# Altium PCB PG4D.PcbDoc (part 3 of 3)
Units mm, origin at the board's own origin, x right, y up, seen from the top; angles counter-clockwise.
Board outline 105.86 x 51.8 mm, 4 copper layers (Top Layer, L2 Flex GND, L3 Flex Signals, Bottom Layer), stack 0.361 mm thick; 218 components, 118 nets, 582 pads, 307 vias.
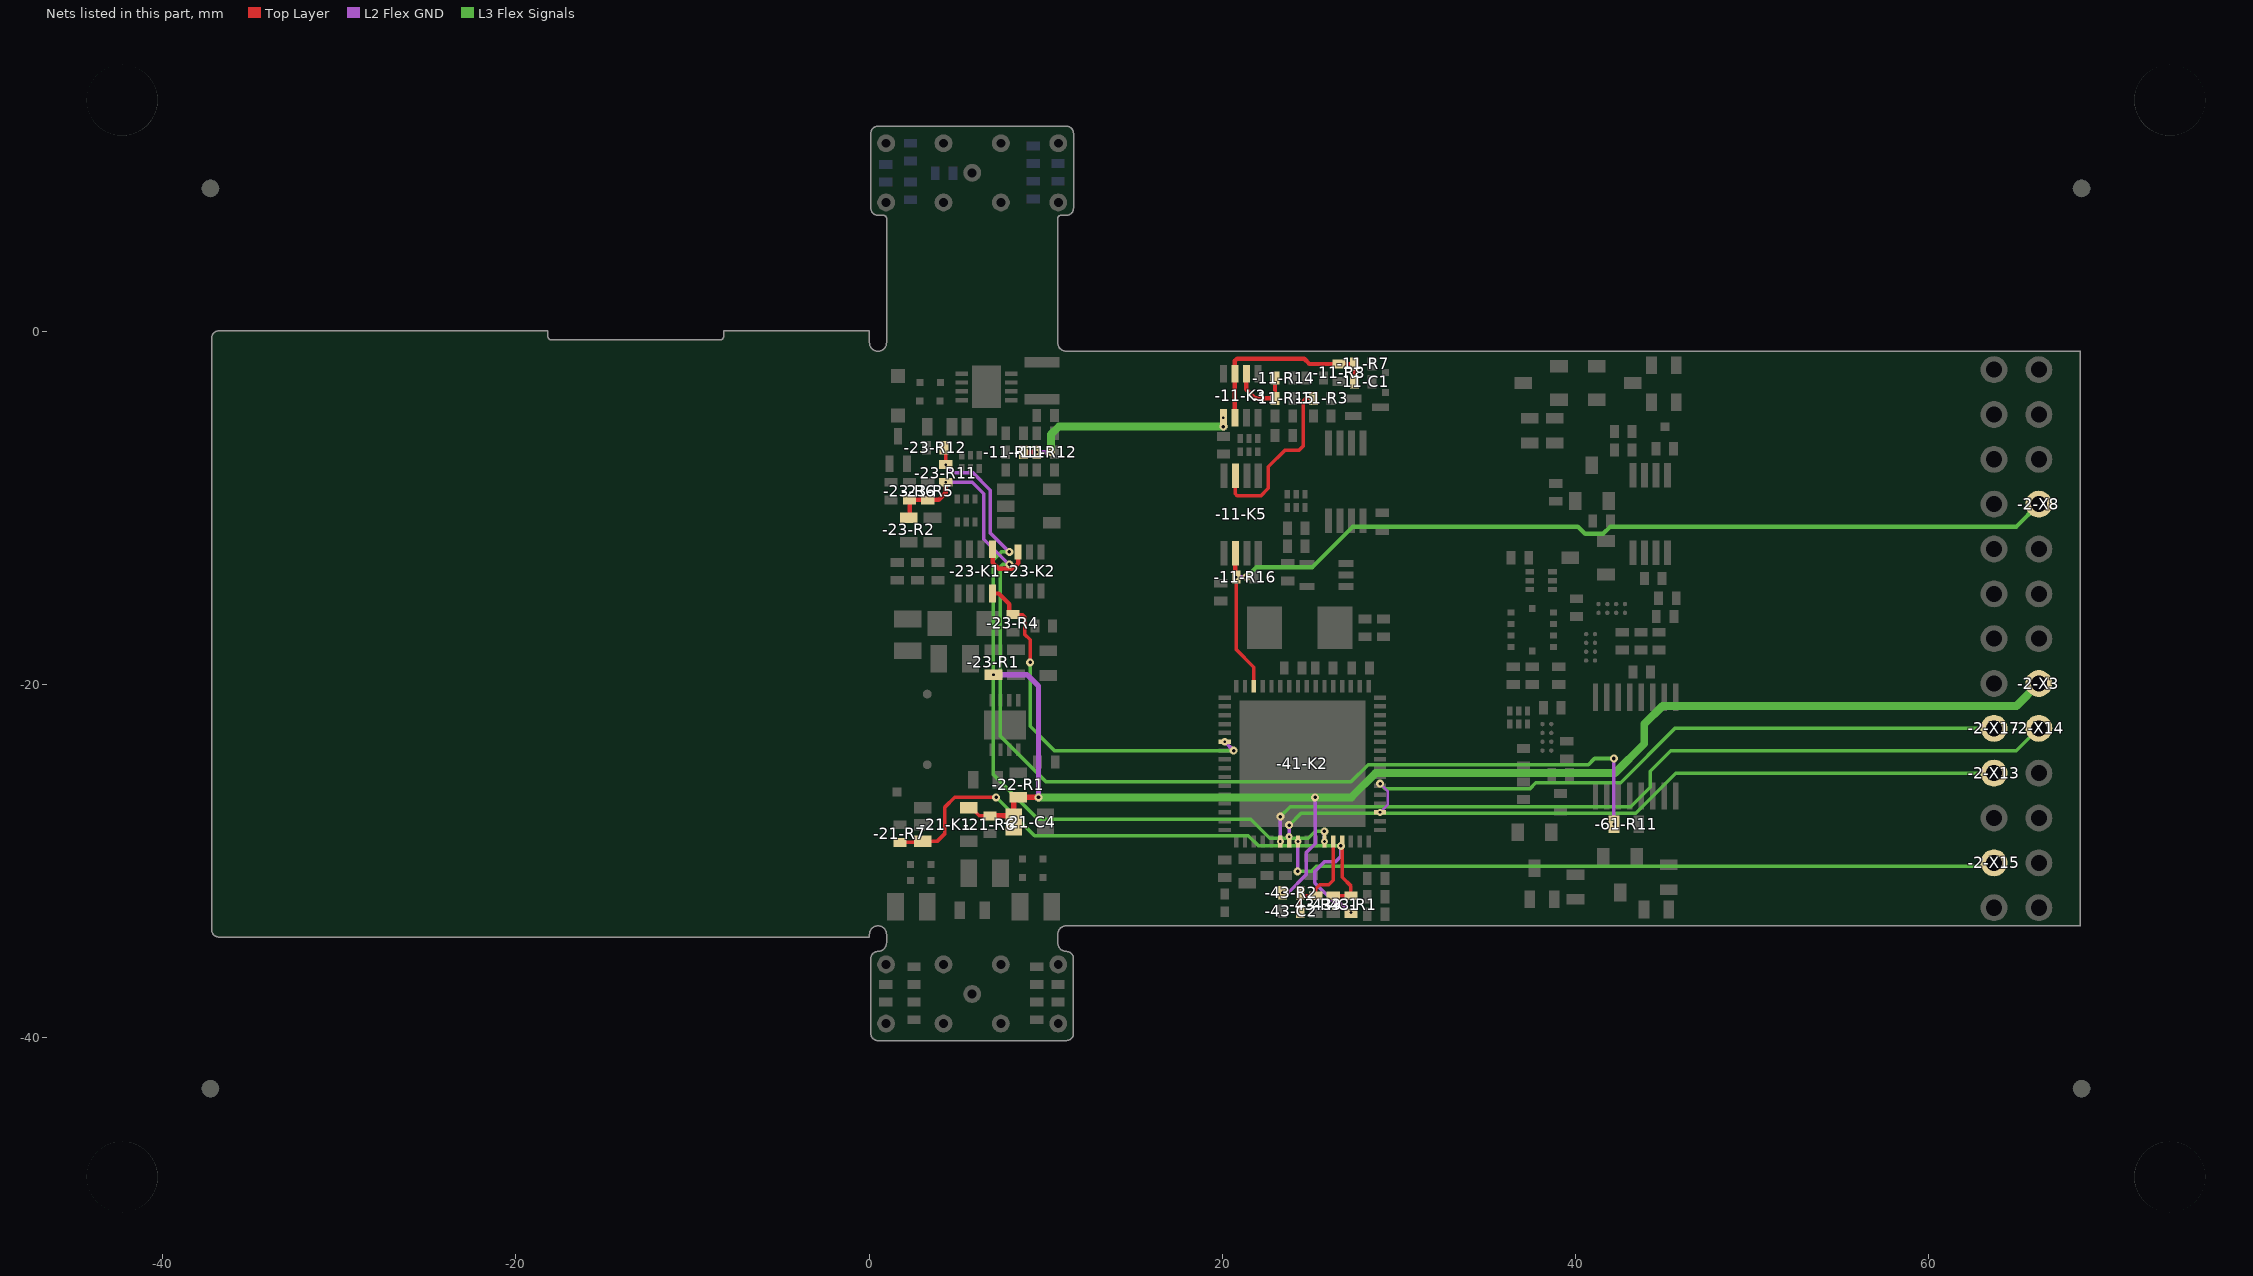
[diagram p5: the nets of this part, all layers, seen from the top]

## Via types
v1: diameter 0.45, hole 0.15, Top Layer to L2 Flex GND, tented both sides, 88 vias
v2: diameter 0.45, hole 0.2, Top Layer to Bottom Layer, tented both sides, 74 vias
v3: diameter 0.4, hole 0.15, Top Layer to L2 Flex GND, tented both sides, 61 vias
v4: diameter 0.45, hole 0.2, L2 Flex GND to L3 Flex Signals, 41 vias
v5: diameter 0.45, hole 0.2, L2 Flex GND to L3 Flex Signals, tented both sides, 23 vias
v6: diameter 0.4, hole 0.15, Top Layer to L2 Flex GND, tented top, 9 vias
v7: diameter 0.45, hole 0.15, Top Layer to L2 Flex GND, 8 vias
v8: diameter 0.45, hole 0.15, Top Layer to L2 Flex GND, tented top, 3 vias

## Nets (pads, with @x,y where several pads share a name; then routed paths per layer and width w, separated by ;. In a path a pad name is that pad's centre, name@x,y a point inside that pad or via, vN(x,y) a via of type N, cw(c..) or ccw(c..) an arc to the next point about the centre after c; other vN are vias at no path point) (continued)
TDI: -2-X14.1 -41-K2.54 | length 47
  L2 Flex GND w0.2: v3(23.3,-28.9) v4(23.3,-27.487)
  L3 Flex Signals w0.2: v4(23.3,-27.487) 23.862,-26.925 43.15,-26.925 44.25,-25.825 44.25,-24.925 45.414,-23.761 65,-23.761 -2-X14.1@66.27,-22.491
TDO: -2-X13.1 -41-K2.55 | length 41.8
  L2 Flex GND w0.2: v3(23.8,-28.625) v4(23.8,-27.975)
  L3 Flex Signals w0.2: v4(23.8,-27.975) 24.475,-27.3 43.439,-27.3 45.708,-25.031 -2-X13.1@63.73,-25.031
TMS: -2-X15.1 -41-K2.56 | length 41.4
  L2 Flex GND w0.2: v4(24.275,-30.6) 24.3,-30.575 v3(24.3,-28.9)
  L3 Flex Signals w0.2: v4(24.275,-30.6) 25.05,-30.6 25.35,-30.3 63.541,-30.3 -2-X15.1@63.73,-30.111
TXCAN: -2-X8.1 -11-K5.2 -11-R16.2 -41-K2.30 | length 55.5
  Top Layer w0.2: v1(20.8,-13.925) 20.8,-18.025 21.8,-19.025 -41-K2.30@21.8,-20.1
  Top Layer w0.25: -11-R16.2@20.75,-13.975 -11-K5.2@20.75,-12.575
  L2 Flex GND w0.25: v1(20.8,-13.925) v4(21.375,-13.925)
  L3 Flex Signals w0.25: v4(21.375,-13.925) 21.925,-13.375 25.1,-13.375 27.414,-11.061 40.15,-11.061 40.564,-11.475 41.586,-11.475 42,-11.061 65,-11.061 -2-X8.1@66.27,-9.791
TXCANBUS: -11-K5.7 -11-R3.2 | length 10
  Top Layer w0.2: -11-K5.7@20.75,-8.175 20.75,-9.2 20.875,-9.325 22.2,-9.325 22.625,-8.9 22.625,-7.675 23.575,-6.725 24.375,-6.725 24.6,-6.5 24.6,-3.95 24.75,-3.8 -11-R3.2@25.175,-3.8
TXD0: -2-X17.1 -41-K2.3 | length 38.3
  L2 Flex GND w0.15: v3(28.95,-27.25) 29.377,-26.823 29.377,-26.052 v5(28.95,-25.625)
  L3 Flex Signals w0.2: v5(28.95,-25.625) 29.25,-25.925 37.425,-25.925 37.775,-25.575 42.575,-25.575 45.659,-22.491 -2-X17.1@63.73,-22.491
VABD: -11-C1.1 -11-K3.3 -11-K3.6 -11-R7.2 -11-R8.1 | length 11
  Top Layer w0.25: -11-K3.6@20.725,-4.9 -11-K3.3@20.725,-2.4 20.725,-1.675 20.85,-1.55 24.65,-1.55 24.95,-1.85 -11-R8.1@26.6,-1.85 ; -11-R8.1@26.75,-1.85 -11-R7.2@27.5,-1.85 -11-C1.1@27.5,-2.85
VCTRL: -23-K1.1 -23-K2.6 | length 3.1
  Top Layer w0.25: -23-K1.1@7,-12.35 7,-13.1 7.35,-13.45 8.15,-13.45 8.45,-13.15 -23-K2.6@8.45,-12.5
VIC: -21-K1.3 -21-R7.1 -43-R1.1 | length 33.8
  Top Layer w0.2: -21-R7.1@1.75,-28.95 -21-K1.3@3.05,-28.95 ; -21-K1.3@3.05,-28.9 3.85,-28.9 4.3,-28.45 4.3,-26.95 4.85,-26.4 v2(7.2,-26.4)
  L2 Flex GND w0.2: v4(26.725,-29.15) 26.725,-29.75 26.425,-30.05 25.8,-30.05 25.25,-30.6 25.25,-31.25 26.375,-32.375 26.7,-32.375 27.25,-32.925 v1(27.3,-32.925)
  L3 Flex Signals w0.2: v2(7.2,-26.4) 9.375,-28.575 21.488,-28.575 22.063,-29.15 v4(26.725,-29.15)
VICAIN: -41-K2.61 -43-C1.1 -43-R1.2 | length 4.3
  Top Layer w0.2: -43-C1.1@26.3,-31.975 -43-R1.2@27.3,-31.975 27.3,-31.425 26.8,-30.925 -41-K2.61@26.8,-28.9
VIN: -2-X3.1 -21-C4.1 -21-K1.5 -21-R6.2 -22-R1.1 -23-R1.1 -43-R2.1 | length 81.1
  Top Layer w0.15: -21-K1.5@5.65,-27 5.85,-27 -21-K1.5@5.82,-27.03
  Top Layer w0.2: -21-K1.5@5.82,-27.03 6.241,-27.45 -21-R6.2@6.85,-27.45
  Top Layer w0.3: -21-R6.2@6.85,-27.45 -21-C4.1@8.2,-27.45 ; -21-C4.1@8.2,-27.8 -21-C4.1@8.2,-27.45 ; v2(9.6,-26.4) -22-R1.1@8.45,-26.4 8.2,-26.4 -21-C4.1@8.2,-27.45
  L2 Flex GND w0.2: v1(23.425,-31.8) 23.75,-31.8 24.775,-30.775 24.775,-29.525 25.277,-29.023 25.277,-26.402 v4(25.275,-26.4)
  L2 Flex GND w0.3: v1(7.05,-19.45) 8.95,-19.45 9.6,-20.1 v2(9.6,-26.4)
  L3 Flex Signals w0.45: v2(9.6,-26.4) v4(25.275,-26.4) 27.324,-26.4 28.701,-25.023 29.199,-25.023 42.252,-25.023 43.917,-23.358 43.917,-22.25 44.946,-21.221 65,-21.221 -2-X3.1@66.27,-19.951
VINAIN: -41-K2.60 -43-C2.1 -43-R2.2 -43-R3.1 | length 5.7
  Top Layer w0.2: -43-C2.1@24.425,-32.85 -43-R2.2@24.425,-31.975 ; -43-R2.2@24.425,-31.8 -43-R2.2@24.425,-31.975 ; -41-K2.60@26.3,-28.9 26.3,-31.1 26.05,-31.35 25.525,-31.35 25.3,-31.575 -43-R3.1@25.3,-31.975 -43-R2.2@24.425,-31.975
VOS: -23-R2.2 -23-R5.1 -23-R6.1 -23-R11.1 -61-R11.1 | length 61.3
  Top Layer w0.25: -23-R2.2@2.25,-10.55 2.3,-10.5 -23-R6.1@2.3,-9.55 ; -23-R6.1@2.35,-9.6 -23-R6.1@2.3,-9.55 ; v1(4.35,-8.55) 4.35,-9.15 3.95,-9.55 3.35,-9.55 -23-R5.1@3.325,-9.55 -23-R6.1@2.3,-9.55
  L2 Flex GND w0.2: v1(4.35,-8.55) 5.85,-8.55 6.502,-9.202 6.502,-11.777 7.925,-13.2 v5(7.95,-13.2) ; v1(42.2,-27.925) 42.175,-27.925 42.2,-27.9 v5(42.2,-24.2)
  L3 Flex Signals w0.2: v5(7.95,-13.2) 7.575,-13.2 7.425,-13.35 7.425,-22.925 10.025,-25.525 27.3,-25.525 28.279,-24.546 40.754,-24.546 41.1,-24.2 v5(42.2,-24.2)
VOSEN: -23-K1.8 -23-R4.1 -41-K2.38 | length 21.8
  Top Layer w0.2: -23-R4.1@8.15,-16.05 8.7,-16.05 8.825,-16.175 8.825,-17.175 9.125,-17.475 v2(9.125,-18.75)
  Top Layer w0.25: -23-K1.8@7,-14.85 7.35,-14.85 7.95,-15.45 7.95,-15.95 8.05,-16.05 -23-R4.1@8.15,-16.05
  L2 Flex GND w0.2: v3(20.15,-23.25) v4(20.65,-23.75)
  L3 Flex Signals w0.2: v2(9.125,-18.75) 9.125,-22.375 10.5,-23.75 v4(20.65,-23.75)
VOSNS: -23-R11.2 -23-R12.1 -41-K2.59 | length 42.3
  Top Layer w0.2: v1(4.35,-7.55) -23-R12.1@4.35,-6.6
  L2 Flex GND w0.2: v1(4.35,-7.55) 4.8,-8 5.875,-8 6.875,-9 6.875,-11.425 v5(7.95,-12.5) ; v3(25.8,-28.9) v4(25.8,-28.325)
  L3 Flex Signals w0.2: v5(7.95,-12.5) 7.5,-12.5 7.05,-12.95 7.05,-25.125 9.575,-27.65 21.625,-27.65 22.7,-28.725 24.875,-28.725 25.275,-28.325 v4(25.8,-28.325)
VTN: -11-K3.5 -11-R11.2 -11-R12.1 | length 13
  Top Layer w0.25: -11-R11.2@8.75,-6.85 v1(9.5,-6.85)
  L2 Flex GND w0.25: v1(9.5,-6.85) v4(10.3,-6.85) ; v4(20.075,-5.4) v3(20.075,-4.9)
  L3 Flex Signals w0.45: v4(10.3,-6.85) 10.3,-5.85 10.75,-5.4 v4(20.075,-5.4)
VTP: -11-K3.2 -11-R14.2 -11-R15.1 | length 3.9
  Top Layer w0.25: -11-K3.2@21.375,-2.4 21.375,-3.275 21.9,-3.8 -11-R15.1@23,-3.8 -11-R14.2@23,-2.65
pads on no net: -11-K1.4 -11-K1.7 -11-K4.5 -11-K6.2 -11-K6.3 -11-K6.6 -11-K6.7 -21-K1.1 -22-K1.4 -22-K1.7 -23-K3.5 -41-K1.1 -41-K2.1 -41-K2.6 -41-K2.7 -41-K2.8 -41-K2.9 -41-K2.10 -41-K2.18 -41-K2.19 -41-K2.28 -41-K2.29 -41-K2.32 -41-K2.33 -41-K2.34 -41-K2.35 -41-K2.39 -41-K2.41 -41-K2.42 -41-K2.44 -41-K2.45 -41-K2.46 -41-K2.47 -42-B1.3 -43-B2.2 -43-B2.3 -43-B2.6 -43-B2.8 -61-K2.12 -61-K5.5 Fid1.1.00mm Fid1.tp Fid2.1.00mm Fid2.tp Fid3.1.00mm Fid3.tp Fid4.1.00mm Fid4.tp Fid5.Fid Fid6.Fid Fid7.1.00mm Fid7.tp Fid8.1.00mm Fid8.tp Fid9.1.00mm Fid9.tp Fid10.1.00mm Fid10.tp TH1.4.01mm TH2.4.01mm TH3.4.01mm TH4.4.01mm

## Polygon pours and split planes (outlines as drawn)
GND on Bottom Layer "GND" (solid, remove dead copper, pour order 25): 5.45,-6.45 0.594,-6.45 0.594,-31.675 2.35,-33.425 10.875,-33.425 10.875,-11.7 6.35,-11.7 6.35,-8.85 5.45,-8.85
3V3 on Bottom Layer "3v3" (solid, remove dead copper, pour order 19): 29.794,-6.5 29.794,-33.655 19.294,-33.655 19.294,-11.7 20.375,-11.7 24.037,-8 25.575,-8 25.575,-6.35 26.175,-5.825 28,-5.825 28,-6.5
3V3 on Bottom Layer "3V3" (solid, remove dead copper, pour order 29): 46.294,-4.039 46.3,-6.53 46.294,-33.655 35.794,-33.655 35.794,-6.502 39.04,-6.502 39.04,-4.039
no net on Bottom Layer "dead-copper" (solid, pour order 15): 61.444,-1.155 61.471,-1.128 68.596,-1.128 68.596,-3.75 61.444,-3.75
GND on L2 Flex GND "GND" (solid, remove dead copper, pour order 21): 19.525,-11.7 20.375,-11.7 20.925,-11.15 24.037,-8 25.575,-8 25.575,-6.35 26.175,-5.825 29.575,-5.825 29.575,-33.655 19.525,-33.655
BUSB on L2 Flex GND "BUSB" (solid, remove dead copper, pour order 24): 29.575,-1.155 19.475,-1.155 19.475,-11.35 20.304,-11.35 23.803,-7.725 25.225,-7.725 25.225,-6.15 25.925,-5.55 28.4,-5.55 28.399,-5.549 29.575,-5.549
3V3BUS on L2 Flex GND "GND" (solid, remove dead copper, pour order 23): 25.325,-2.5 25.325,-4.95 22.85,-4.95 22.85,-2.5
GND on L2 Flex GND "GND" (solid, remove dead copper, pour order 22): 68.596,-4.064 61.675,-4.064 61.675,-33.655 68.596,-33.655
GND on L2 Flex GND "GND" (hatched 45Degree grid 0.4 track 0.15, pour order 31): 29.425,-6.575 29.425,-33.655 36.175,-33.655 36.175,-6.575
GND on L2 Flex GND "GND" (hatched 45Degree grid 0.4 track 0.15, pour order 20): 19.55,-11.775 10.775,-11.775 10.75,-33.655 19.55,-33.65
BUSB on L2 Flex GND "BUSB" (hatched 45Degree grid 0.4 track 0.15, pour order 35): 19.625,-1.155 19.625,-11.275 10.85,-11.275 10.85,-1.155
BUSB on L2 Flex GND "BUSB" (solid, remove dead copper, pour order 36): 10.875,-1.425 10.875,-11.35 7.825,-11.35 7.825,-7.775 7.45,-7.775 7.45,-6.1 2.125,-6.1 2.125,-1.425
GND on L2 Flex GND "GND" (solid, remove dead copper, pour order 26): 5.45,-6.45 0.594,-6.45 0.594,-31.675 2.35,-33.425 10.875,-33.425 10.875,-11.7 6.35,-11.7 6.35,-8.85 5.45,-8.85
GND on L2 Flex GND "GND" (solid, remove dead copper, pour order 28): 46.075,-33.655 36.025,-33.655 36.025,-6.5 39.04,-6.502 39.04,-4.039 46.076,-4.039 46.075,-6.5

## Keep-outs
L2 Flex GND:
  lines w0.025: 0.594,-33.655 0.594,-1.155
Bottom Layer:
  lines w0.025: 19.294,-33.655 19.294,-1.155 ; 29.794,-33.655 29.794,-1.155 ; 35.794,-33.655 35.794,-1.155 ; 46.294,-33.655 46.294,-1.155
Keep-Out Layer:
  lines w0.05: 0.127,6.975 0.127,11.214 cw(c0.508,11.214) 0.508,11.595 11.176,11.595 11.178,11.595 cw(c11.178,11.214) 11.559,11.214 11.559,6.975 cw(c11.179,6.975) 11.179,6.595 10.857,6.595 ccw(c10.87,6.395) 10.67,6.395 10.67,-0.647 ; 0.129,6.975 ccw(c0.509,6.975) 0.509,6.595 0.83,6.595 cw(c0.818,6.395) 1.018,6.395 1.016,-0.647 cw(c0.508,-0.647) 0,-0.647 0,0 -8.215,0 -8.215,-0.3 cw(c-8.415,-0.3) -8.415,-0.5 -18.015,-0.5 cw(c-18.015,-0.3) -18.215,-0.3 -18.215,0 -36.834,0 ccw(c-36.834,-0.381) -37.215,-0.381 -37.215,-33.909 ccw(c-36.834,-33.909) -36.834,-34.29 0,-34.29 0,-34.163 cw(c0.508,-34.163) 1.016,-34.163 1.016,-34.647 cw(c0.508,-34.647) 0.508,-35.155 ccw(c0.508,-35.536) 0.127,-35.536 0.127,-39.774 ccw(c0.508,-39.774) 0.508,-40.155 11.176,-40.155 ccw(c11.176,-39.774) 11.557,-39.774 11.557,-35.536 ccw(c11.176,-35.536) 11.176,-35.155 cw(c11.176,-34.647) 10.668,-34.647 10.668,-34.163 cw(c11.176,-34.163) 11.176,-33.655 68.596,-33.655 68.596,-1.155 11.176,-1.155 cw(c11.176,-0.647) 10.668,-0.647

## Other copper
Top Layer:
  region net Net-22-K1_1: 4.7,-24.7 6.85,-24.7 7.05,-24.5 7.05,-23.9 5.1,-23.9 4.7,-24.3
  region net Net-22-C2_1: 5.217,-21.5 5.55,-21.5 6.85,-20.2 6.85,-20.025 4.725,-20.025 4.55,-20.2 4.55,-20.7
  text ".Layer_Name" at 2.65,-62.55 h1.52
L2 Flex GND:
  text ".Layer_Name" at 2.65,-62.55 h1.52
L3 Flex Signals:
  text ".Layer_Name" at 2.65,-62.55 h1.52
Bottom Layer:
  text ".Layer_Name" at 2.65,-62.55 h1.52

## Silkscreen, mask and mechanical layers (free items; w line width, h text height)
Top Overlay:
  text ".Layer_Name" at 2.65,-62.55 h1.52
Top Paste:
  text ".Layer_Name" at 2.65,-62.55 h1.52
Bottom Paste:
  text ".Layer_Name" at 2.65,-62.55 h1.52
Top Solder:
  rectangle: 11.094,-33.655 19.294,-1.155
  rectangle: 29.794,-33.655 35.8,-1.155
  rectangle: 46.294,-33.655 61.444,-1.155
  region: 0.594,-33.655 11.094,-33.655 10.915,-33.73 10.79,-33.83 10.715,-33.955 10.668,-34.081 10.668,-34.647 10.69,-34.805 10.79,-34.98 10.94,-35.105 11.176,-35.155 0.508,-35.155 0.715,-35.105 0.865,-35.005 0.99,-34.83 1.016,-34.647 1.016,-34.163 0.99,-34.005 0.915,-33.855 0.765,-33.73
  region: 10.857,6.595 10.715,6.52 10.67,6.407 10.67,-0.645 10.668,-0.647 10.668,-0.729 10.79,-0.98 11.094,-1.155 0.594,-1.155 0.865,-1.005 1.016,-0.733 1.016,6.409 0.965,6.52 0.83,6.595
  region: -36.875,-34.275 0,-34.275 0,-34.075 0.05,-33.925 0.125,-33.8 0.275,-33.7 0.425,-33.65 0.43,-33.655 0.594,-33.655 0.594,-1.155 0.375,-1.125 0.175,-1.05 0.075,-0.925 0,-0.75 0,0 -8.215,0 -8.215,-0.3 -8.225,-0.375 -8.275,-0.45 -8.325,-0.475 -8.415,-0.5 -18.015,-0.5 -18.1,-0.475 -18.15,-0.45 -18.2,-0.375 -18.215,-0.3 -18.215,0 -36.875,0 -36.975,-0.025 -37.1,-0.1 -37.175,-0.2 -37.2,-0.325 -37.2,-33.95 -37.175,-34.075 -37.1,-34.175 -37,-34.25
  lines w0.05: 10.668,-0.647 10.668,-0.647
  text ".Layer_Name" at 2.65,-62.55 h1.52
Bottom Solder:
  rectangle: 11.094,-33.655 19.294,-1.155
  rectangle: 29.794,-33.655 35.8,-1.155
  rectangle: 46.294,-33.655 61.444,-1.155
  region: 10.857,6.595 10.715,6.52 10.67,6.407 10.67,-0.645 10.668,-0.647 10.668,-0.729 10.79,-0.98 11.094,-1.155 0.594,-1.155 0.865,-1.005 1.016,-0.733 1.016,6.409 0.965,6.52 0.83,6.595
  region: 0.594,-33.655 11.094,-33.655 10.915,-33.73 10.79,-33.83 10.715,-33.955 10.668,-34.081 10.668,-34.647 10.69,-34.805 10.79,-34.98 10.94,-35.105 11.176,-35.155 0.508,-35.155 0.715,-35.105 0.865,-35.005 0.99,-34.83 1.016,-34.647 1.016,-34.163 0.99,-34.005 0.915,-33.855 0.765,-33.73
  region: -36.875,-34.275 0,-34.275 0,-34.075 0.05,-33.925 0.125,-33.8 0.275,-33.7 0.425,-33.65 0.43,-33.655 0.594,-33.655 0.594,-1.155 0.375,-1.125 0.175,-1.05 0.075,-0.925 0,-0.75 0,0 -8.215,0 -8.215,-0.3 -8.225,-0.375 -8.275,-0.45 -8.325,-0.475 -8.415,-0.5 -18.015,-0.5 -18.1,-0.475 -18.15,-0.45 -18.2,-0.375 -18.215,-0.3 -18.215,0 -36.875,0 -36.975,-0.025 -37.1,-0.1 -37.175,-0.2 -37.2,-0.325 -37.2,-33.95 -37.175,-34.075 -37.1,-34.175 -37,-34.25
  lines w0.05: 10.668,-0.647 10.668,-0.647
  text ".Layer_Name" at 2.65,-62.55 h1.52
Mechanical 1:
  lines w0.025: -49.31,-54.905 80.691,-54.905 80.691,20.095 -49.31,20.095 -49.31,-54.905
Coverlayer Top:
  rectangle: 11.094,-33.655 19.294,-1.155
  rectangle: 29.794,-33.655 35.8,-1.155
  rectangle: 46.294,-33.655 61.444,-1.155
  rectangle: 11.094,-33.655 19.294,-1.155
  rectangle: 29.794,-33.655 35.8,-1.155
  rectangle: 46.294,-33.655 61.444,-1.155
  region: 0.769,-1.155 0.594,-1.155 0.75,-1.1 0.9,-1 0.975,-0.875 1.025,-0.725 1.025,6.45 0.975,6.525 0.9,6.6 10.8,6.595 10.725,6.55 10.675,6.475 10.669,-0.675 10.7,-0.85 10.8,-1 10.975,-1.1 11.144,-1.15 11.157,-1.15
  region: 0.65,-35.15 11.1,-35.15 10.8,-35 10.675,-34.725 10.675,-34.074 10.725,-33.925 10.8,-33.8 10.925,-33.725 11.074,-33.675 0.6,-33.675 0.775,-33.725 0.9,-33.825 0.975,-33.95 1.025,-34.1 1.025,-34.775 0.875,-35
  region: -36.875,-34.275 0,-34.275 0,-34.075 0.05,-33.925 0.125,-33.8 0.275,-33.7 0.425,-33.65 0.43,-33.655 0.594,-33.655 0.594,-1.155 0.375,-1.125 0.175,-1.05 0.075,-0.925 0,-0.75 0,0 -8.215,0 -8.215,-0.3 -8.225,-0.375 -8.275,-0.45 -8.325,-0.475 -8.415,-0.5 -18.015,-0.5 -18.1,-0.475 -18.15,-0.45 -18.2,-0.375 -18.215,-0.3 -18.215,0 -36.875,0 -36.975,-0.025 -37.1,-0.1 -37.175,-0.2 -37.2,-0.325 -37.2,-33.95 -37.175,-34.075 -37.1,-34.175 -37,-34.25
  region: -36.875,-34.275 0,-34.275 0,-34.075 0.05,-33.925 0.125,-33.8 0.275,-33.7 0.425,-33.65 0.43,-33.655 0.594,-33.655 0.594,-1.155 0.375,-1.125 0.175,-1.05 0.075,-0.925 0,-0.75 0,0 -8.215,0 -8.215,-0.3 -8.225,-0.375 -8.275,-0.45 -8.325,-0.475 -8.415,-0.5 -18.015,-0.5 -18.1,-0.475 -18.15,-0.45 -18.2,-0.375 -18.215,-0.3 -18.215,0 -36.875,0 -36.975,-0.025 -37.1,-0.1 -37.175,-0.2 -37.2,-0.325 -37.2,-33.95 -37.175,-34.075 -37.1,-34.175 -37,-34.25
  text ".Layer_Name" at 2.65,-62.55 h1.52
Coverlayer Bot:
  rectangle: 11.094,-33.655 19.294,-1.155
  rectangle: 29.794,-33.655 35.8,-1.155
  rectangle: 46.294,-33.655 61.444,-1.155
  region: 0.769,-1.155 0.594,-1.155 0.75,-1.1 0.9,-1 0.975,-0.875 1.025,-0.725 1.025,6.45 0.975,6.525 0.9,6.6 10.8,6.595 10.725,6.55 10.675,6.475 10.669,-0.675 10.7,-0.85 10.8,-1 10.975,-1.1 11.144,-1.15 11.157,-1.15
  region: 0.65,-35.15 11.1,-35.15 10.8,-35 10.675,-34.725 10.675,-34.074 10.725,-33.925 10.8,-33.8 10.925,-33.725 11.074,-33.675 0.6,-33.675 0.775,-33.725 0.9,-33.825 0.975,-33.95 1.025,-34.1 1.025,-34.775 0.875,-35
  region: -36.855,-34.29 0.02,-34.29 0.02,-34.09 0.07,-33.94 0.145,-33.815 0.295,-33.715 0.445,-33.665 0.45,-33.67 0.614,-33.67 0.614,-1.17 0.395,-1.14 0.195,-1.065 0.095,-0.94 0.02,-0.765 0.02,-0.015 -8.195,-0.015 -8.195,-0.315 -8.205,-0.39 -8.255,-0.465 -8.305,-0.49 -8.395,-0.515 -17.995,-0.515 -18.08,-0.49 -18.13,-0.465 -18.18,-0.39 -18.195,-0.315 -18.195,-0.015 -36.855,-0.015 -36.955,-0.04 -37.08,-0.115 -37.155,-0.215 -37.18,-0.34 -37.18,-33.965 -37.155,-34.09 -37.08,-34.19 -36.98,-34.265
  text ".Layer_Name" at 2.65,-62.575 h1.52
Strip:
  circle w0.025: c73.691,13.095 r2.007
  circle w0.025: c73.691,-47.905 r2.007
  circle w0.025: c-42.31,-47.905 r2.007
  circle w0.025: c-42.31,13.095 r2.007
  lines w0.025: -39.215,-29.655 -37.215,-29.655 ; -39.215,-27.155 -37.215,-27.155 ; -39.215,-7.655 -37.215,-7.655 ; -39.215,-5.155 -37.215,-5.155 ; 0.127,6.976 0.127,11.214 cw(c0.508,11.214) 0.508,11.595 4.594,11.595 4.594,13.595 ; 0.129,6.975 ccw(c0.509,6.975) 0.509,6.595 ; 0.51,11.595 11.178,11.595 cw(c11.178,11.214) 11.559,11.214 11.559,6.975 cw(c11.179,6.975) 11.179,6.595 ; 4.594,-42.155 4.594,-40.155 ; 7.094,-42.155 7.094,-40.155 ; 7.094,13.595 7.094,11.595 11.176,11.595 cw(c11.176,11.214) 11.243,11.589 ; 23.294,-35.655 23.294,-33.655 ; 23.294,-1.155 23.294,0.845 ; 25.794,-35.655 25.794,-33.655 ; 25.794,-1.155 25.794,0.845 ; 39.794,-35.655 39.794,-33.655 ; 39.794,-1.155 39.794,0.845 ; 42.294,-35.655 42.294,-33.655 ; 42.294,-1.155 42.294,0.845 ; 68.596,-29.655 70.596,-29.655 ; 68.596,-27.155 70.596,-27.155 ; 68.596,-7.655 70.596,-7.655 ; 68.596,-5.155 70.596,-5.155 ; 0,-34.29 -36.834,-34.29 cw(c-36.834,-33.909) -37.215,-33.909 -37.215,-0.381 cw(c-36.834,-0.381) -36.834,0 -18.215,0 -18.215,-0.3 ccw(c-18.015,-0.3) -18.015,-0.5 -8.415,-0.5 ccw(c-8.415,-0.3) -8.215,-0.3 -8.215,0 0,0 0,-0.647 ccw(c0.508,-0.647) 1.016,-0.647 1.018,6.395 ccw(c0.818,6.395) 0.83,6.595 0.509,6.595 ; 0,-34.29 0,-34.29 ; 0,-34.29 0,-34.163 cw(c0.508,-34.163) 1.016,-34.163 1.016,-34.647 cw(c0.508,-34.647) 0.508,-35.155 ; 0.508,-35.155 ccw(c0.508,-35.536) 0.127,-35.536 0.127,-39.774 ccw(c0.508,-39.774) 0.508,-40.155 11.176,-40.155 ccw(c11.176,-39.774) 11.557,-39.774 11.557,-35.536 ccw(c11.176,-35.536) 11.176,-35.155 ; 0.508,-35.155 11.176,-35.155 ; 0.509,6.595 11.179,6.595 ; 11.176,-35.155 cw(c11.176,-34.647) 10.668,-34.647 10.668,-34.163 cw(c11.176,-34.163) 11.176,-33.655 19.294,-33.655 ; 11.179,6.595 10.857,6.595 ccw(c10.87,6.395) 10.67,6.395 10.668,-0.647 ccw(c11.176,-0.647) 11.176,-1.155 19.294,-1.155 ; 19.294,-33.655 29.794,-33.655 ; 19.294,-33.655 19.294,-1.155 ; 19.294,-1.155 29.794,-1.155 ; 29.794,-33.655 35.794,-33.655 ; 29.794,-33.655 29.794,-1.155 ; 29.794,-1.155 35.794,-1.155 ; 35.794,-33.655 46.294,-33.655 ; 35.794,-33.655 35.794,-1.155 ; 35.794,-1.155 46.294,-1.155 ; 46.294,-33.655 61.444,-33.655 ; 46.294,-33.655 46.294,-1.155 ; 46.294,-1.155 61.444,-1.155 ; 61.444,-33.655 68.596,-33.655 68.596,-1.155 61.444,-1.155 ; 61.444,-33.655 61.444,-1.155 ; -49.31,-54.905 80.691,-54.905 80.691,20.095 -49.31,20.095 -49.31,-54.905 ; -39.215,-33.909 ccw(c-36.834,-33.909) -36.834,-36.29 -1.873,-36.29 -1.873,-39.774 ccw(c0.508,-39.774) 0.508,-42.155 11.176,-42.155 ccw(c11.176,-39.774) 13.557,-39.774 13.557,-35.655 70.596,-35.655 70.596,0.845 12.668,0.845 12.669,5.119 ccw(c11.179,6.975) 13.559,6.975 13.559,11.214 ccw(c11.178,11.214) 11.178,13.595 0.51,13.595 ccw(c0.51,11.214) -1.871,11.214 -1.871,6.975 ccw(c0.509,6.975) -0.983,5.12 -0.983,2 -10.215,2 -10.215,1.5 -16.215,1.5 -16.215,2 -36.834,2 ccw(c-36.834,-0.381) -39.215,-0.381 -39.215,-33.909 ; 0.594,-33.655 0.594,-1.155 11.094,-1.155 11.094,-33.655 0.594,-33.655
Board Outline:
  lines w0.05: 0.127,6.975 0.127,11.214 cw(c0.508,11.214) 0.508,11.595 11.176,11.595 11.178,11.595 cw(c11.178,11.214) 11.559,11.214 11.559,6.975 cw(c11.179,6.975) 11.179,6.595 10.857,6.595 ccw(c10.87,6.395) 10.67,6.395 10.67,-0.647 ; 0.129,6.975 ccw(c0.509,6.975) 0.509,6.595 0.83,6.595 cw(c0.818,6.395) 1.018,6.395 1.016,-0.647 cw(c0.508,-0.647) 0,-0.647 0,0 -8.215,0 -8.215,-0.3 cw(c-8.415,-0.3) -8.415,-0.5 -18.015,-0.5 cw(c-18.015,-0.3) -18.215,-0.3 -18.215,0 -36.834,0 ccw(c-36.834,-0.381) -37.215,-0.381 -37.215,-33.909 ccw(c-36.834,-33.909) -36.834,-34.29 0,-34.29 0,-34.163 cw(c0.508,-34.163) 1.016,-34.163 1.016,-34.647 cw(c0.508,-34.647) 0.508,-35.155 ccw(c0.508,-35.536) 0.127,-35.536 0.127,-39.774 ccw(c0.508,-39.774) 0.508,-40.155 11.176,-40.155 ccw(c11.176,-39.774) 11.557,-39.774 11.557,-35.536 ccw(c11.176,-35.536) 11.176,-35.155 cw(c11.176,-34.647) 10.668,-34.647 10.668,-34.163 cw(c11.176,-34.163) 11.176,-33.655 68.596,-33.655 68.596,-1.155 11.176,-1.155 cw(c11.176,-0.647) 10.668,-0.647
Rigid Outline:
  lines w0.025: 0.508,11.595 11.176,11.595 ; 0.51,11.595 ccw(c0.51,11.214) 0.129,11.214 0.129,6.975 ccw(c0.509,6.975) 0.509,6.595 11.179,6.595 ccw(c11.179,6.975) 11.559,6.975 11.559,11.214 ccw(c11.178,11.214) 11.178,11.595 ; 0.127,-39.774 ccw(c0.508,-39.774) 0.508,-40.155 11.176,-40.155 ccw(c11.176,-39.774) 11.557,-39.774 11.557,-35.536 ccw(c11.176,-35.536) 11.176,-35.155 0.508,-35.155 ccw(c0.508,-35.536) 0.127,-35.536 0.127,-39.774 ; 0.594,-33.655 11.094,-33.655 11.094,-1.155 0.594,-1.155 0.594,-33.655 ; 19.294,-33.655 29.794,-33.655 29.794,-1.155 19.294,-1.155 19.294,-33.655 ; 35.794,-33.655 35.794,-1.155 46.294,-1.155 46.294,-33.655 35.794,-33.655 ; 61.444,-33.655 61.444,-1.155 68.596,-1.155 68.596,-33.655 61.444,-33.655
Mechanical 10:
  lines w0.254: 0.15,-66.55 0.15,-56.55 ; 27.65,-66.55 27.65,-56.55 ; -29.35,-66.55 -29.35,-56.55 65.65,-56.55 65.65,-66.55 -29.35,-66.55
  text "AVID TECHNOLOGIES" at -26.35,-59.55 h1.52
  text "FES" at 43.1,-60.3 h1.52
  text "SO 218500" at -20.85,-62.55 h1.52
  text "PG4 Rev D" at 38.5,-64 h1.52
  text ".Print_Date" at -21,-65.05 h1.52
Outline:
  circle w0.025: c0.965,-35.862 r0.254
  circle w0.025: c4.216,-39.215 r0.254
  circle w0.025: c7.468,-35.862 r0.254
  circle w0.025: c10.719,-39.215 r0.254
  circle w0.025: c10.719,-35.862 r0.254
  circle w0.025: c7.468,-39.215 r0.254
  circle w0.025: c4.216,-35.862 r0.254
  circle w0.025: c0.965,-39.215 r0.254
  circle w0.025: c5.842,-37.539 r0.254
  circle w0.025: c5.844,8.979 r0.254
  circle w0.025: c0.967,7.302 r0.254
  circle w0.025: c0.967,10.655 r0.254
  circle w0.025: c4.219,10.655 r0.254
  circle w0.025: c4.219,7.302 r0.254
  circle w0.025: c7.47,7.302 r0.254
  circle w0.025: c7.47,10.655 r0.254
  circle w0.025: c10.721,10.655 r0.254
  circle w0.025: c10.721,7.302 r0.254
  lines w0.025: 0.508,11.595 11.176,11.595 cw(c11.176,11.214) 11.243,11.589 ; 0.51,11.595 ccw(c0.51,11.214) 0.129,11.214 0.129,6.975 ccw(c0.509,6.975) 0.509,6.595 ; 11.178,11.595 cw(c11.178,11.214) 11.559,11.214 11.559,6.975 cw(c11.179,6.975) 11.179,6.595 ; 0.508,-35.155 ccw(c0.508,-35.536) 0.127,-35.536 0.127,-39.774 ccw(c0.508,-39.774) 0.508,-40.155 11.176,-40.155 ccw(c11.176,-39.774) 11.557,-39.774 11.557,-35.536 ccw(c11.176,-35.536) 11.176,-35.155 ; 0.508,-35.155 ccw(c0.508,-34.647) 1.016,-34.647 1.016,-34.163 ccw(c0.508,-34.163) 0,-34.163 0,-34.29 -36.834,-34.29 cw(c-36.834,-33.909) -37.215,-33.909 -37.215,-0.381 cw(c-36.834,-0.381) -36.834,0 -18.215,0 -18.215,-0.3 ccw(c-18.015,-0.3) -18.015,-0.5 -8.415,-0.5 ccw(c-8.415,-0.3) -8.215,-0.3 -8.215,0 0,0 0,-0.647 ccw(c0.508,-0.647) 1.016,-0.647 1.018,6.395 ccw(c0.818,6.395) 0.83,6.595 0.509,6.595 ; 0.508,-35.155 11.176,-35.155 ; 0.509,6.595 11.179,6.595 ; 11.176,-35.155 cw(c11.176,-34.647) 10.668,-34.647 10.668,-34.163 cw(c11.176,-34.163) 11.176,-33.655 19.294,-33.655 ; 11.179,6.595 10.857,6.595 ccw(c10.87,6.395) 10.67,6.395 10.668,-0.647 ccw(c11.176,-0.647) 11.176,-1.155 19.294,-1.155 ; 19.294,-33.655 29.794,-33.655 ; 19.294,-33.655 19.294,-1.155 ; 19.294,-1.155 29.794,-1.155 ; 29.794,-33.655 29.794,-1.155 ; 29.794,-33.655 35.794,-33.655 ; 29.794,-1.155 35.794,-1.155 ; 35.794,-33.655 46.294,-33.655 ; 35.794,-33.655 35.794,-1.155 ; 35.794,-1.155 46.294,-1.155 ; 46.294,-33.655 46.294,-1.155 ; 46.294,-33.655 61.444,-33.655 ; 46.294,-1.155 61.444,-1.155 ; 61.444,-33.655 68.596,-33.655 68.596,-1.155 61.444,-1.155 ; 61.444,-33.655 61.444,-1.155 ; 0.594,-33.655 11.094,-33.655 11.094,-1.155 0.594,-1.155 0.594,-33.655
  text "Flex Area" at 2.233,2.684 h1.25
  text "Flex Area" at 14.647,-13.368 h1.25 r270
  text "Flex Area" at 32.372,-13.362 h1.25 r270
  text "Flex Area" at 53.132,-13.377 h1.25 r270
  text "Flex Area" at -21.725,-17.15 h1.25
  text "Flex Area" at 2.278,-34.993 h1.25
Drill Drawing:
  circle w0.025: c95.533,-68.671 r0.527
  lines w0.381: 93.558,-70.145 133.829,-70.145 ; 93.558,-66.986 133.829,-66.986 ; 101.922,-73.304 101.922,-63.827 ; 110.747,-73.304 110.747,-63.827 ; 126.338,-73.304 126.338,-63.827 ; 93.558,-73.304 133.829,-73.304 133.829,-63.827 93.558,-63.827 93.558,-73.304
  text "Symbol" at 95.454,-66.038 h1.83
  text "Hit Count" at 102.87,-66.038 h1.83
  text "Finished Hole Size" at 111.695,-66.038 h1.83
  text "Plated" at 127.286,-66.038 h1.83
  text "64" at 102.87,-69.197 h1.52
  text "0.200mm (7.87mil)" at 111.695,-69.197 h1.52
  text "PTH" at 127.286,-69.197 h1.52
  text "64 Total" at 102.87,-72.356 h1.52
Fab1:
  text "Top-Bottom" at 95.7,-52.13 h1.52
Fab2:
  text "Layer 1 - Layer 2" at 95.4,-61.93 h1.52
Fab3:
  text "Layer 2 - Layer 3" at 95.4,-61.93 h1.52
Fab4:
  drawing of 134 lines, arcs and shapes, not listed
  text "1. BOARD TECHNOLOGY:" at 86.5,37.91 h1.52
  text "A. The Flexible PCB shall be fabricated to IPC-6013/Types 1 to 3 and 5, Class 3 standards." at 88.25,35.91 h1.52
  text "B. Material shall be polyimide, 4 layers, with 17.5um base copper." at 88.25,33.91 h1.52
  text "C. Maximum overall board thickness is 450um." at 88.25,31.91 h1.52
  text "2. Finish shall be ENIG:" at 86.5,29.37 h1.52
  text "A. Electroless nickel thickness: 3 - 6um ( refereto IPC-4552)" at 88.25,27.37 h1.52
  text "B. Immersion gold thickness: 0.051 - 0.127um (refer to IPC-4552)" at 88.25,25.12 h1.52
  text "3. Solder Mask shall be LPI, Green, 15 - 25um thick, and on both sides." at 86.5,22.999 h1.52
  text "4. No silkscreen on either side." at 86.5,21.094 h1.52
  text "5. Electrical Test: Continuity and shorts 100% tested." at 86.5,19.188 h1.52
  text "6. Certificate of Conformity:" at 86.5,16.67 h1.52
  text "A. Complete description of the item with revision" at 88.25,14.67 h1.52
  text "B. Number of lot and Date Code" at 88.25,12.42 h1.52
  text "C. Delivered quantity" at 88.25,10.17 h1.52
  text "D. RoHS compliance" at 88.25,7.92 h1.52
  text "E. Remark/Exception as concession note" at 88.25,5.67 h1.52
  text "F. Name of the responsible with signature and date" at 88.25,3.42 h1.52
  text "7. Inspection Report:" at 86.36,0.715 h1.52
  text "A. Type of used base material and metallizations processes" at 88.11,-1.285 h1.52
  text "1. Brand, reference and lot number of used base material" at 90.015,-3.535 h1.52
  text "2. Used metallizations and processes (chemical/galvanic) on Cu, Ni and Au" at 90.015,-5.785 h1.52
  text "B. Visual checks and results:" at 88.11,-8.035 h1.52
  text "1. Aspect (contamination, color, asperities, residues, mark, scraping, repair, etc.)" at 90.015,-10.285 h1.52
  text "2. Open, short-circuit, etching non-conformities" at 90.015,-12.535 h1.52
  text "3. Metallization adherance according to IPC-TM-650 -- Method 2.4.1" at 90.015,-14.785 h1.52
  text "4. Soldermask adherance according to IPC-TM-650 -- Method 2.4.28.1" at 90.015,-17.035 h1.52
  text "C. Dimensional checks and results:" at 88.011,-19.327 h1.52
  text "1. Length and width of Strip" at 89.916,-21.577 h1.52
  text "2. Length, width and total thickness of circuit" at 89.916,-23.827 h1.52
  text "3. Diameter of index holes" at 89.916,-26.077 h1.52
  text "8. Microsection report:" at 86.36,-28.489 h1.52
  text "A. Configuration of stack-up with measurements of different thicknesses" at 88.11,-30.489 h1.52
  text "B. Thickness of Nickel and Gold metallizations on external layer" at 88.11,-32.739 h1.52
  text "C. Thickness of Copper metallization" at 88.11,-34.989 h1.52
  text "D. Pictures of these micro-sections, general results and approval by responsible" at 88.11,-37.239 h1.52
  text "9. Solderability test report:" at 86.487,-40.157 h1.52
  text "A. Result of the solderability test according to ANSI/J-STD-003 -- Test A -- Coating Durability -- Category 3" at 88.237,-42.157 h1.52
  text "10. Marking of nonconforming circuits:" at 86.487,-45.22 h1.52
  text "A. A dark blue cross shall be drawn to cover both external sides of the defective circuits." at 88.237,-47.22 h1.52
  text "LAYER STACKUP" at 3.048,-62.738 h1.52
  text "FLEX AREA" at -36.449,-70.993 h1.02
  text "RIGID AREA" at 15.621,-70.993 h1.02
  text "Solder Mask Top" at 58.801,-75.692 h0.89
  text "Layer 1 (Cu/Ni/Au)  --  0.5oz base" at 58.801,-76.962 h0.89
  text "106 Prepreg  --  50u" at 58.801,-78.867 h0.89
  text "106 Prepreg  --  50u" at 58.801,-81.407 h0.89
  text "LF7001" at -49.911,-82.042 h0.89
  text "Layer 2 (Cu)" at -55.118,-83.312 h0.89
  text "Layer 2 (Cu)  --  0.5oz" at 58.801,-83.312 h0.89
  text "Polyimide - AP8515R" at -61.214,-85.217 h0.89
  text "Polyimide - AP8515R  --  25u" at 58.801,-85.217 h0.89
  text "Layer 3 (Cu)" at -55.118,-87.122 h0.89
  text "Layer 3 (Cu)  --  0.5oz" at 58.801,-87.122 h0.89
  text "LF7001" at -49.911,-88.392 h0.89
  text "106 Prepreg  --  50u" at 58.801,-89.027 h0.89
  text "106 Prepreg  --  50u" at 58.801,-91.567 h0.89
  text "Layer 4 (Cu/Ni/Au)  --  0.5oz base" at 58.801,-93.472 h0.89
  text "Solder Mask Bottom" at 58.801,-94.742 h0.89

## Dimensions
68.622,-1.155 to 0.51,11.595 on Outline
0.025,-34.29 to 0.594,-1.155 on Outline
0.025,-34.29 to 11.094,-1.155 on Outline
0.025,-34.29 to 19.294,-1.155 on Outline
0.025,-34.29 to 29.794,-1.155 on Outline
0.025,-34.29 to 35.794,-1.155 on Outline
0.025,-34.29 to 46.294,-1.155 on Outline
0.025,-34.29 to 61.444,-1.155 on Outline
0.025,-34.29 to 68.596,-1.155 on Outline
-36.834,-34.315 to 0.025,-34.29 on Outline
1.018,6.395 to 10.67,6.395 on Outline
-37.215,-33.909 to 0.127,-39.774 on Outline
-36.834,-34.315 to 11.557,-39.774 on Outline
-36.834,0 to 0.509,6.595 on Outline
-36.834,0 to 0.508,-35.155 on Outline
11.179,6.595 to 11.176,11.595 on Outline
10.693,-34.647 to 10.693,-34.163 on Outline
-49.31,-54.905 to -42.31,-47.905 on Drill Drawing
-49.31,-54.905 to -42.31,-47.905 on Drill Drawing
-42.31,-47.905 to -42.31,13.095 on Drill Drawing
-42.31,13.095 to 73.69,13.095 on Drill Drawing
-49.31,-54.905 to -49.31,20.095 on Drill Drawing
-49.31,20.095 to 80.691,20.095 on Drill Drawing
4.594,13.595 to 7.094,13.595 on Drill Drawing

## Text inside footprints (layer, text, board x,y; h text height)
-11-K1: Top Assy "1" at 4.75,-2.5 h0.3
-11-K2: Top Assy "1" at 7.05,-9.1 h0.5
-11-K3: Top Assy "1" at 22.3,-1.9 h0.5
-11-K4: Top Assy "1" at 22.2,-5.8 h0.3
-11-K5: Top Assy "1" at 19.6,-13.4 h0.5
-11-K6: Top Assy "1" at 28.3,-5.8 h0.5
-11-K7: Top Assy "1" at 24.9,-8.9 h0.3
-11-R4: Top Assy "K" at 29.3,-2 h0.3
-11-R5: Top Assy "K" at 4.2,-2.6 h0.3
-11-R6: Top Assy "K" at 2.5,-4.05 h0.3
-21-K1: Top Assy "1" at 2.35,-27.15 h0.5
-21-R2: Top Assy "K" at 3.8,-30.3 h0.3
-21-R3: Top Assy "K" at 8.325,-30 h0.3
-21-R4: Top Assy "K" at 1.975,-31.2 h0.3
-21-R5: Top Assy "K" at 10.2,-31 h0.3
-22-K1: Top Assy "1" at 7.05,-24.2 h0.3 r90
-23-K1: Top Assy "1" at 7.3,-12 h0.5
-23-K2: Top Assy "1" at 8,-15.3 h0.5
-23-K3: Top Assy "1" at 6.4,-6.8 h0.3
-23-Q2: Top Assy "1" at 6.3,-9.2 h0.4
-41-K1: Top Assy "1" at 27.6,-14.6 h0.3
-41-K2: Top Assy "64" at 28.5,-29.4 h0.3; Top Assy "49" at 20.3,-29.4 h0.3; Top Assy "48" at 19.6,-28.7 h0.3; Top Assy "33" at 19.6,-20.5 h0.3; Top Assy "32" at 20.3,-19.8 h0.3; Top Assy "17" at 28.6,-19.8 h0.3; Top Assy "16" at 29.2,-20.5 h0.3; Top Assy "1" at 29.4,-28.4 h0.3
-41-R10: Top Assy "K" at 20.25,-32.825 h0.3 r90
-42-B1: Top Assy "1" at 39.1,-14.7 h0.4
-61-C11: Top Assy "1" at 38.8,-4.425 h0.3 r270
-61-C12: Top Assy "1" at 43.825,-4.075 h0.3
-61-C13: Top Assy "1" at 36.925,-32.225 h0.3
-61-C14: Top Assy "1" at 45.25,-29.725 h0.3 r270
-61-K1: Top Assy "1" at 39,-23.9 h0.5
-61-K2: Top Assy "1" at 45.6,-19.8 h0.4; Top Assy "8" at 41.025,-19.725 h0.4 r270; Top Assy "9" at 41.025,-27.175 h0.4 r270; Top Assy "16" at 45.6,-27.5 h0.4
-61-K3: Top Assy "1" at 40.175,-17.4 h0.5
-61-K4: Top Assy "1" at 42.675,-15.1 h0.5
-61-K5: Top Assy "1" at 37.5,-21.2 h0.3
-61-K6: Top Assy "1" at 42.8,-13.5 h0.5
-61-K7: Top Assy "1" at 39.9,-10.6 h0.5
-61-Q1: Top Assy "1" at 39.7,-4 h0.5
-61-Q2: Top Assy "1" at 40.5,-1.9 h0.5
-61-Q3: Top Assy "1" at 39.1,-28 h0.5
-61-Q4: Top Assy "1" at 44,-29.3 h0.5
-61-Q5: Top Assy "1" at 42.4,-13.9 h0.5